# Altium PCB LDR_Module_v2_PCB.PcbDoc
Units mm, origin at the board's own origin, x right, y up, seen from the top; angles counter-clockwise.
Board outline 22.5 x 38.5 mm, 2 copper layers (Top Layer, Bottom Layer), stack 1.571 mm thick; 11 components, 7 nets, 32 pads, 4 vias.
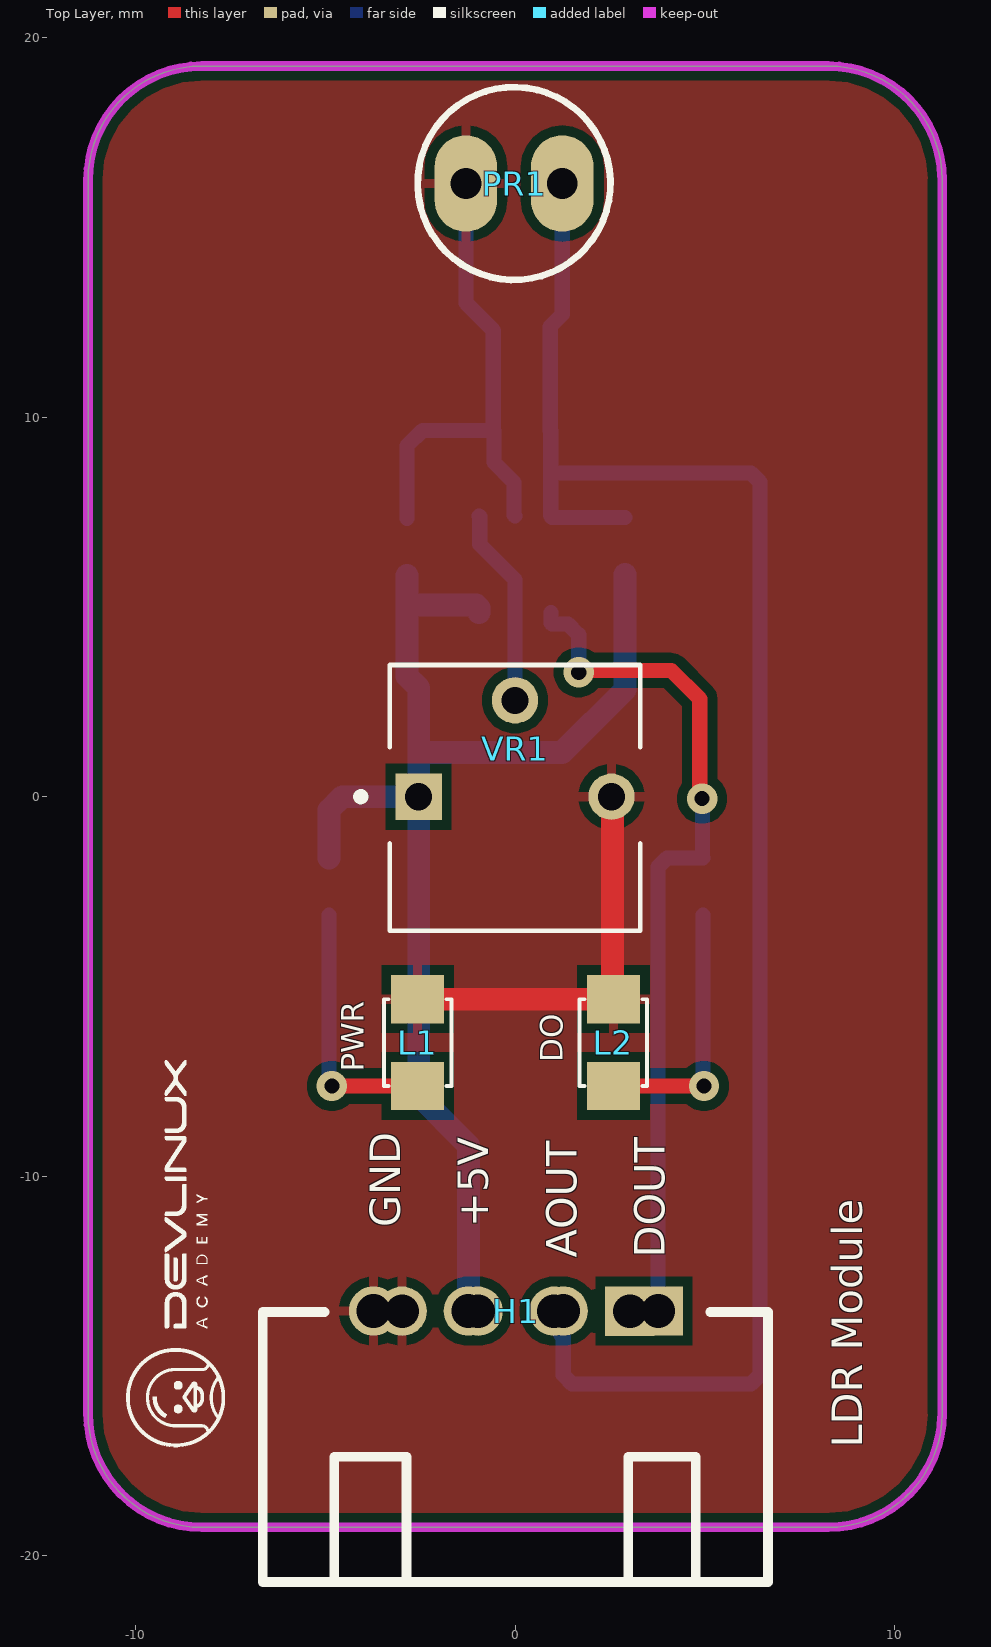
[diagram p0: Top Layer view]
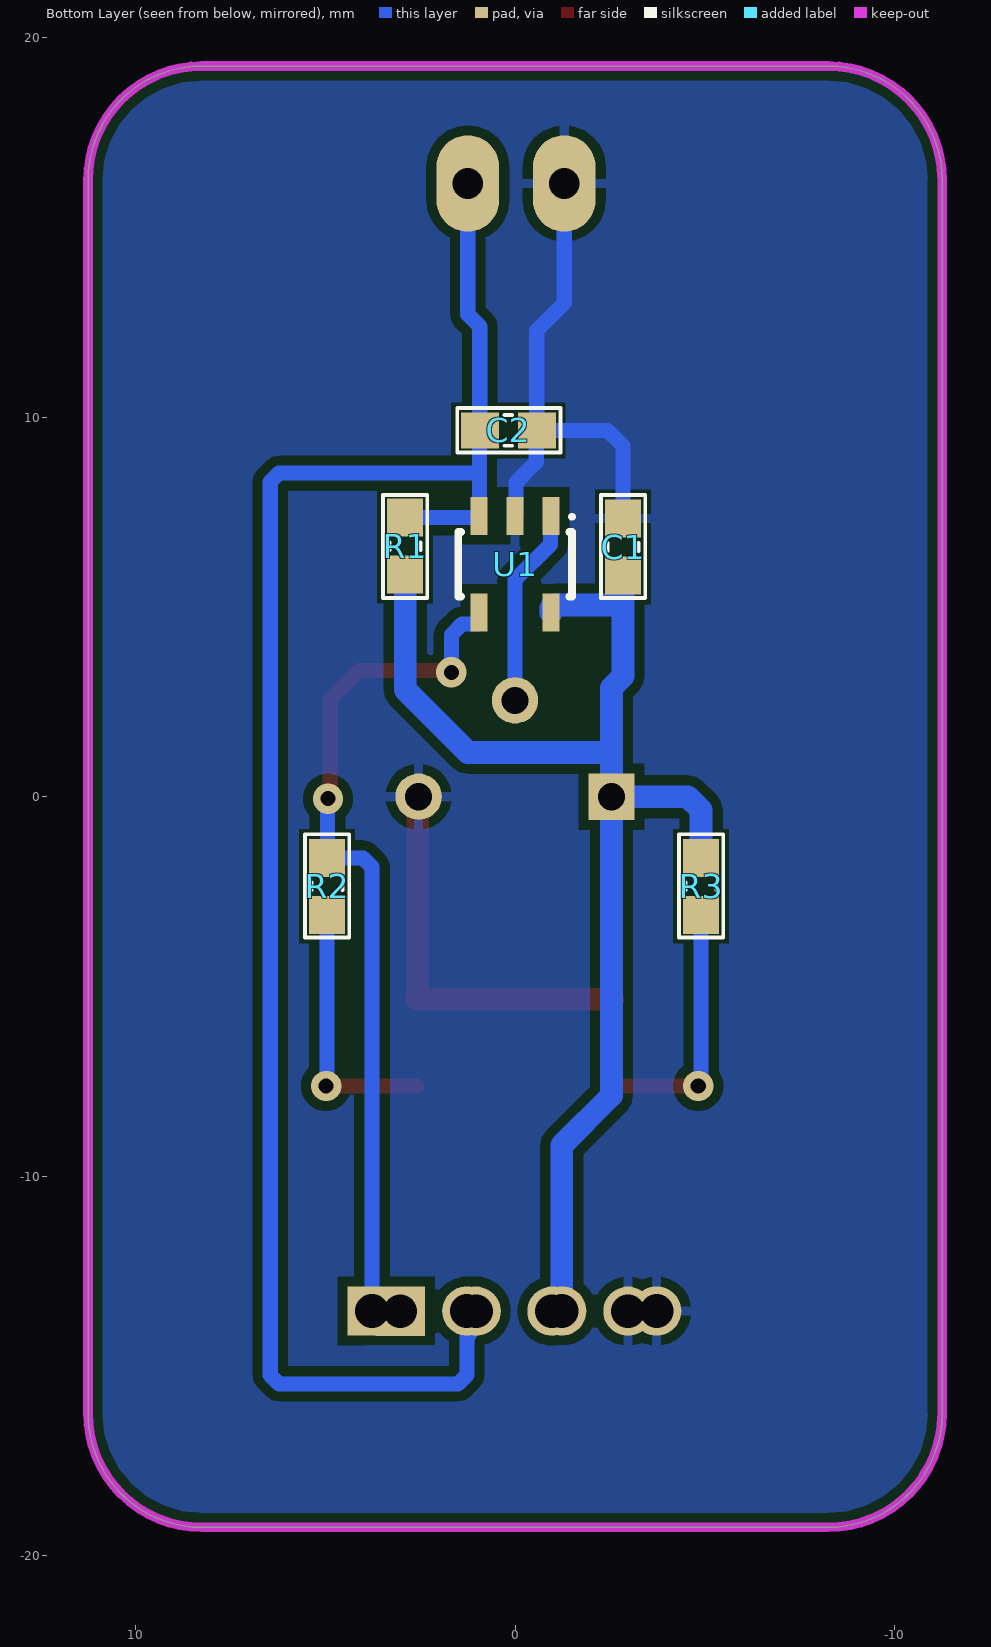
[diagram p1: Bottom Layer view, seen from below]
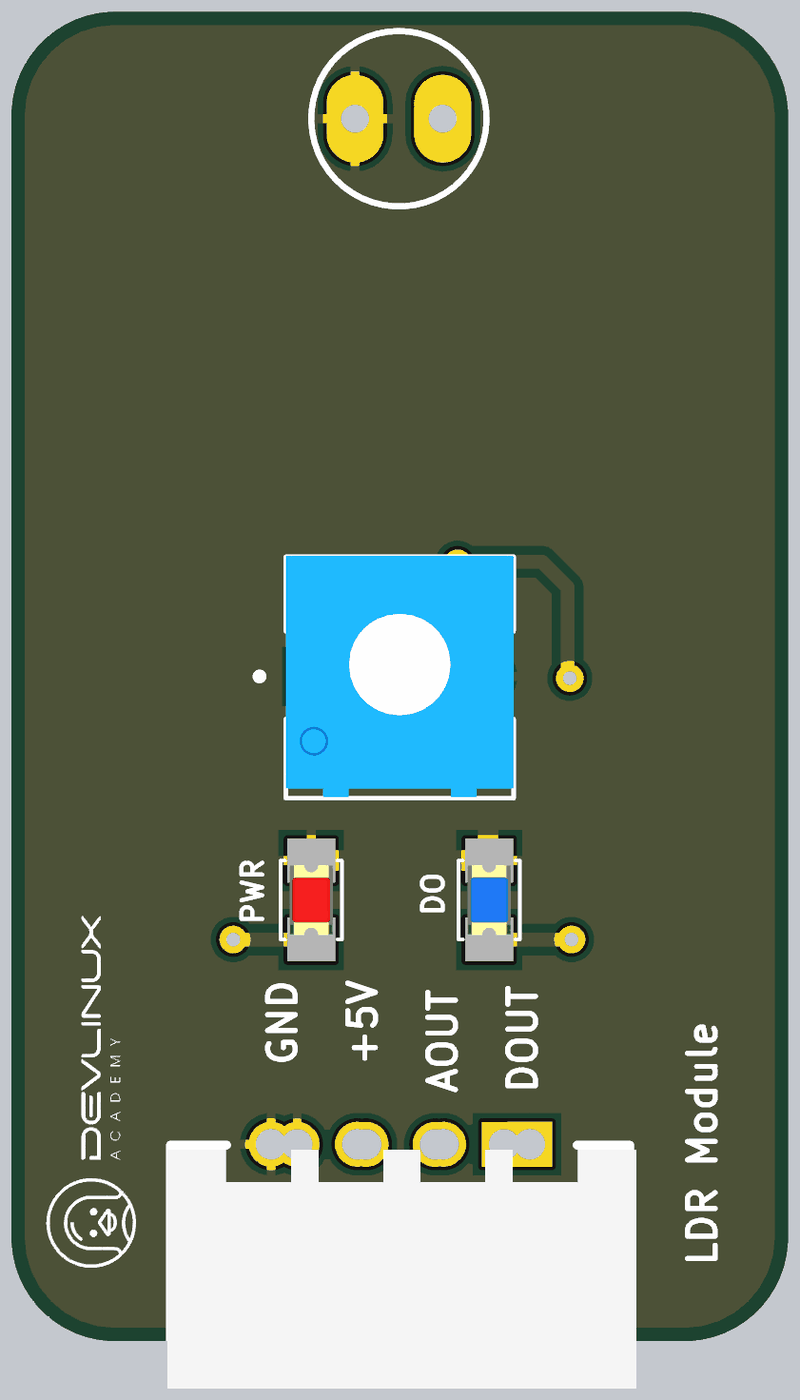
[diagram p2: 3D render of the assembled board from above, using the file's embedded part models]
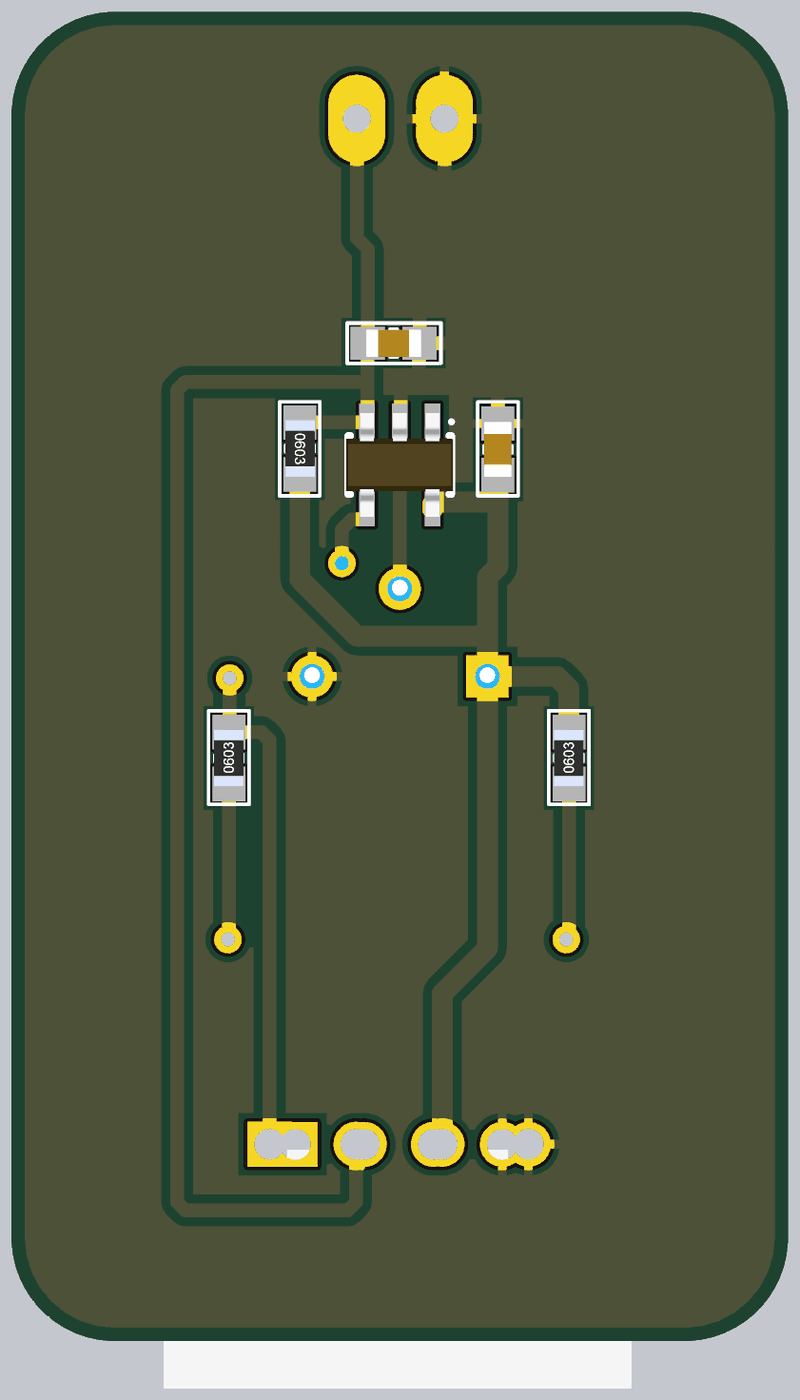
[diagram p3: 3D render of the assembled board from below, using the file's embedded part models]

## Layer stack, top to bottom
Top Solder: solder mask 0.0102, Solder Resist, Dk 3.5
Top Layer: signal copper 0.0356
Dielectric 1: dielectric 1.5, FR-4, Dk 4.8
Bottom Layer: signal copper 0.0356
Bottom Solder: solder mask 0.0102, Solder Resist, Dk 3.5

## Board outline
-11.25,-16.25 -11.25,16.25 cw(c-8.25,16.25) -8.25,19.25 8.25,19.25 cw(c8.25,16.25) 11.25,16.25 11.25,-16.25 cw(c8.25,-16.25) 8.25,-19.25 -8.25,-19.25 cw(c-8.25,-16.25)

## Design rules (kind name [scope] priority, off if disabled: settings)
Clearance [All] p1: gap=0.254 ignorepadtopadclearanceinfootprint=FALSE except(0: Arc-Hole Track-Hole SMDPad-Hole THPad-Hole Via-Hole Fill-Hole Poly-Hole Region-Hole Text-Hole)
PolygonConnect [All] p1: connectstyle=Relief reliefconductorwidth=0.254 reliefentries=4 polygonreliefangle="90 Angle" airgapwidth=0.254
RoomDefinition LDR_Module_v2_SCH [InComponentClass('LDR_Module_v2_SCH')] p1: confinementstyle=ConfineIn formatcopy=TRUE lockcomponents=FALSE outline -43.846,11.769 -51.949,11.769 -51.949,1.406 -43.846,1.406
RoutingVias [All] p1: holewidth=0.4 width=0.8 viastyle="Through Hole" minholewidth=0.3 minwidth=0.6 maxholewidth=0.5 maxwidth=1
SolderMaskExpansion [All] p1: expansion=0.102 istentingtop=FALSE
Width [All] p1: maxlimit=0.6 minlimit=0.254 preferedwidth=0.4
30 further rules are at their usual default settings.

## Components (designator, comment, footprint, x,y, rotation, side; value= is the part's Value field where it differs from the comment)
C1 "100nF" "tu 0603" -2.845,6.579 r90 bottom
C2 "100nF" "tu 0603" 0.178,9.652 r180 bottom
H1 "Header 4P 2.54 + 2.0 Duc Cong" "Header 4P DC 2.54 + 2.0" 3.745,-13.575 r270 top
L1 "LED RED" LED-0805-Red -2.565,-7.62 r90 top
L2 "LED BLUE" LED-0805-Blue 2.591,-7.62 r90 top
PR1 "CDS 5537 5mm" "Quang Tro" -1.295,16.154 r0 top
R1 "10k" "tro smd 0603" 2.896,6.604 r270 bottom
R2 "1k" "tro smd 0603" 4.953,-2.362 r90 bottom
R3 "1k" "tro smd 0603" -4.902,-2.362 r90 bottom
U1 "LM321" sot23-5 0,6.124 r270 bottom
VR1 "10k" TRIM_3362P-1-102 0,0 r0 top

## Footprints (in the part's own frame and the unit in brackets; to place one, negate y for a bottom-side part, rotate by r counter-clockwise, add the part's x,y. Pads: shape width x height; smd on the part's side, far side on the other; paste and mask are expansions set on the pad)
"Header 4P DC 2.54 + 2.0" [mm]
  rect 1.3x1.3 hole 0.889: 1(-0.025,0.025) 1(-0.022,-0.719)
  round 1.3 hole 0.889: 2(-0.025,-2.475) 2(-0.022,-2.719) 3(-0.025,-4.975) 3(-0.022,-4.719) 4(-0.025,-7.475) 4(-0.022,-6.718)
  silkscreen extent 0,-10.39 7.11,2.92, body extent 0.13,-10.48 7.06,3.11, height 7.38
LED-0805-Blue [mil]
  rect 50x55 smd: 1(0,0) 2(90,0)
  silkscreen extent 0,-35 90,35, body extent 5,-25 85,25, height 43
LED-0805-Red [mil]
  rect 50x55 smd: 1(0,0) 2(90,0)
  silkscreen extent 0,-35 90,35, body extent 5,-25 85,25, height 43
"Quang Tro" [mil] "QUANG TRO"
  oval 65x100 hole 32: 1(0,0) 2(100,0)
  silkscreen extent -50,-100 150,100
sot23-5 [mm]
  rect 1x0.45 smd: 1(-1.275,0.95) 2(-1.275,0) 3(-1.275,-0.95) 4(1.275,-0.95) 5(1.275,0.95)
  silkscreen extent -1.3,-1.5 0.85,1.55, body extent -1.5,-1.55 1.5,1.55, height 1.1
TRIM_3362P-1-102 [mm]
  rect 1.222x1.222 / inner round 1.222 / far side rect 1.222x1.222 hole 0.714: 1(-2.54,0)
  round 1.222 hole 0.714: 2(0,2.54) 3(2.54,0)
  silkscreen extent -4.16,-3.53 3.3,3.47, body extent -3.3,-3.49 3.3,3.49, height 4.88
"tro smd 0603" [mm] "Chip Capacitor, 2-Leads, Body 1,60x0,80mm, IPC Medium Density"
  rect 1x0.95 smd mask+0.076: 1(-0.75,0) 2(0.75,0)
  silkscreen extent -1.35,-0.58 1.37,0.58, body extent -0.82,-0.42 0.82,0.43, height 0.44
"tu 0603" [mm] "Chip Capacitor, 2-Leads, Body 1,60x0,80mm, IPC Medium Density"
  rect 1x0.95 smd mask+0.076: 1(-0.75,0) 2(0.75,0)
  silkscreen extent -1.35,-0.58 1.37,0.58, body extent -0.8,-0.4 0.8,0.4, height 0.9

## Part data
C1 C2: library part "Tu 0603 104 50V 10%", "Dán", Chung_Loai=Dán, Don_Vi=Con, Ma_Hang=MH004568, So_Chan=2, Ten_Linh_Kien="Tụ 0603 104-100nF 10% 50V"
H1: "Cắm", Chung_Loai=Cắm, Don_Vi=Con, Ma_Hang=MH001310, Ten_Linh_Kien="Header 4P XH2.54-4P Đực Cong"
L1: library part "LED 0805 Do", "Dán", Chung_Loai=Dán, Don_Vi=Con, Ma_Hang=MH000897, Ten_Linh_Kien="LED 0805 Màu Đỏ (Red)"
L2: library part "LED 0805 Xanh Duong", "Dán", Chung_Loai=Dán, Don_Vi=Con, Ma_Hang=MH002327, Ten_Linh_Kien="LED 0805 Màu Xanh Dương (Blue)"
PR1: library part "Quang Tro", "Photoresistor", Creator="Bien Nguyen"
R1: library part "Tro 0603 1% 10k", "Dán", Chung_Loai=Dán, Don_Vi=Con, Ma_Hang=MH006333, So_Chan=2, Ten_Linh_Kien="Trở 0603 1% 10k"
R2 R3: library part "Tro 0603 1% 1k", "Dán", Chung_Loai=Dán, Don_Vi=Con, Ma_Hang=MH006334, So_Chan=2, Ten_Linh_Kien="Trở 0603 1% 1k"
U1: "Opamp"
VR1: library part "Bien tro vuong", "TRIMMER - 1/4in SQ ST CERMET", Package="3362P-1 Bourns Inc.", Check_prices=https://www.snapeda.com/parts/3362P-1-102/Bourns/view-part/?ref=eda, MF=Bourns, MP=3362P-1-102, SnapEDA_Link=https://www.snapeda.com/parts/3362P-1-102/Bourns/view-part/?ref=snap

## Via types
v1: diameter 0.8, hole 0.4, Top Layer to Bottom Layer, 4 vias

## Nets (pads, with @x,y where several pads share a name; then routed paths per layer and width w, separated by ;. In a path a pad name is that pad's centre, name@x,y a point inside that pad or via, vN(x,y) a via of type N, cw(c..) or ccw(c..) an arc to the next point about the centre after c; other vN are vias at no path point)
+5: C1.1 H1.3 R1.2 R3.2 U1.5 VR1.1 | length 35
  Bottom Layer w0.6: R3.2 -4.902,-0.351 -4.551,0 VR1.1 ; C1.1 -2.845,5.049 ; H1.3@-1.23,-13.55 -1.23,-9.184 -2.54,-7.874 VR1.1 ; U1.5 -0.95,4.974 -1.025,5.049 -2.845,5.049 ; R1.2 2.896,2.819 1.245,1.168 -2.489,1.168 -2.54,1.219 ; -2.845,5.049 -2.845,3.175 -2.54,2.87 -2.54,1.219 ; VR1.1 -2.54,1.219
A_OUT: C2.1 H1.2 PR1.2 R1.1 U1.3 | length 47.1
  Bottom Layer w0.4: PR1.2 1.245,12.7 0.928,12.383 C2.1 0.939,9.641 0.939,8.526 ; H1.2@1.27,-13.55 1.198,-13.622 1.198,-14.166 1.27,-14.238 1.27,-15.234 1.504,-15.469 6.217,-15.469 6.452,-15.234 6.452,8.291 6.217,8.526 0.939,8.526 ; R1.1 0.975,7.354 0.95,7.379 U1.3 0.939,7.411 0.939,8.526
D_OUT: H1.1 R2.2 U1.4 | length 22.8
  Top Layer w0.4: v1(1.676,3.277) 1.727,3.327 4.115,3.327 4.867,2.575 4.867,0.009 v1(4.928,-0.051)
  Bottom Layer w0.4: U1.4 0.95,4.574 0.975,4.549 1.394,4.549 1.676,4.267 v1(1.676,3.277) ; H1.1@3.77,-13.55 3.77,-1.847 4.004,-1.612 R2.2 4.94,-1.599 4.94,-0.064 v1(4.928,-0.051)
GND: C1.2 C2.2 H1.4 L1.2 L2.2 PR1.1 U1.2 VR1.3 | length 24.2
  Top Layer w0.6: L1.2 L2.2 2.565,-5.309 2.565,-0.025 VR1.3
  Bottom Layer w0.4: C1.2 -2.845,9.246 -2.438,9.652 C2.2 ; PR1.1 -1.295,13.005 -0.572,12.282 C2.2 ; U1.2 -0.025,7.424 -0.025,8.28 -0.556,8.811 -0.556,9.636 C2.2
NetL1_1: L1.1 R3.1 | length 6.8
  Top Layer w0.4: v1(-4.826,-7.62) L1.1
  Bottom Layer w0.4: R3.1 -4.902,-7.544 v1(-4.826,-7.62)
NetL2_1: L2.1 R2.1 | length 6.9
  Top Layer w0.4: L2.1 v1(4.978,-7.62)
  Bottom Layer w0.4: R2.1 4.953,-7.595 v1(4.978,-7.62)
NetU1_1: U1.1 VR1.2 | length 5.3
  Bottom Layer w0.4: U1.1 -0.93,7.38 -0.93,6.645 0,5.715 VR1.2

## Polygon pours and split planes (outlines as drawn)
GND on Bottom Layer "NONET_L-01_P-001" (solid, remove dead copper, pour order 0): -15.164,22.987 -14.58,22.403 15.392,22.403 15.392,-26.111 12.497,-23.216 -14.834,-23.216
GND on Top Layer "NONET_L-01_P-001" (solid, remove dead copper, pour order 1): -13.894,22.86 16.104,22.86 16.434,22.53 15.621,21.717 15.621,-24.028 -14.249,-24.028 -15.291,-22.987

## Keep-outs
Keep-Out Layer:
  the board outline again, w0.254

## Silkscreen, mask and mechanical layers (free items; w line width, h text height)
Top Overlay:
  drawing of 21 lines, arcs and shapes, not listed
  text "DO" at 1.252,-6.992 h0.6 r90
  text "PWR" at -3.981,-7.246 h0.6 r90
  text "GND" at -3.02,-11.344 h0.8 r90
  text "+5V" at -0.7,-11.344 h0.8 r90
  text "AOUT" at 1.62,-12.144 h0.8 r90
  text "DOUT" at 3.939,-12.144 h0.8 r90
  text "LDR Module" at 9.146,-17.147 h0.8 r90